# Altium PCB PCB1.PcbDoc
Units mil, origin at the board's own origin, x right, y up, seen from the top; angles counter-clockwise.
Board outline 12099 x 3110 mil, 2 copper layers (Top Layer, Bottom Layer); 46 components, 45 nets, 164 pads, 7 vias.
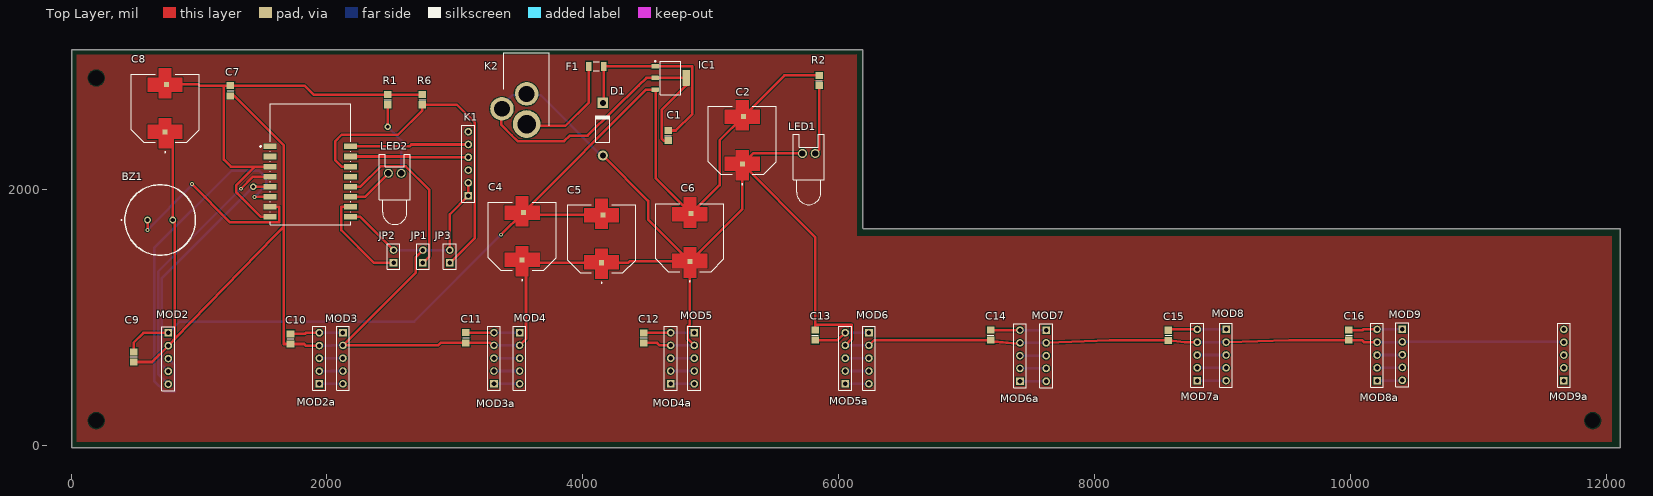
[diagram p0: Top Layer view]
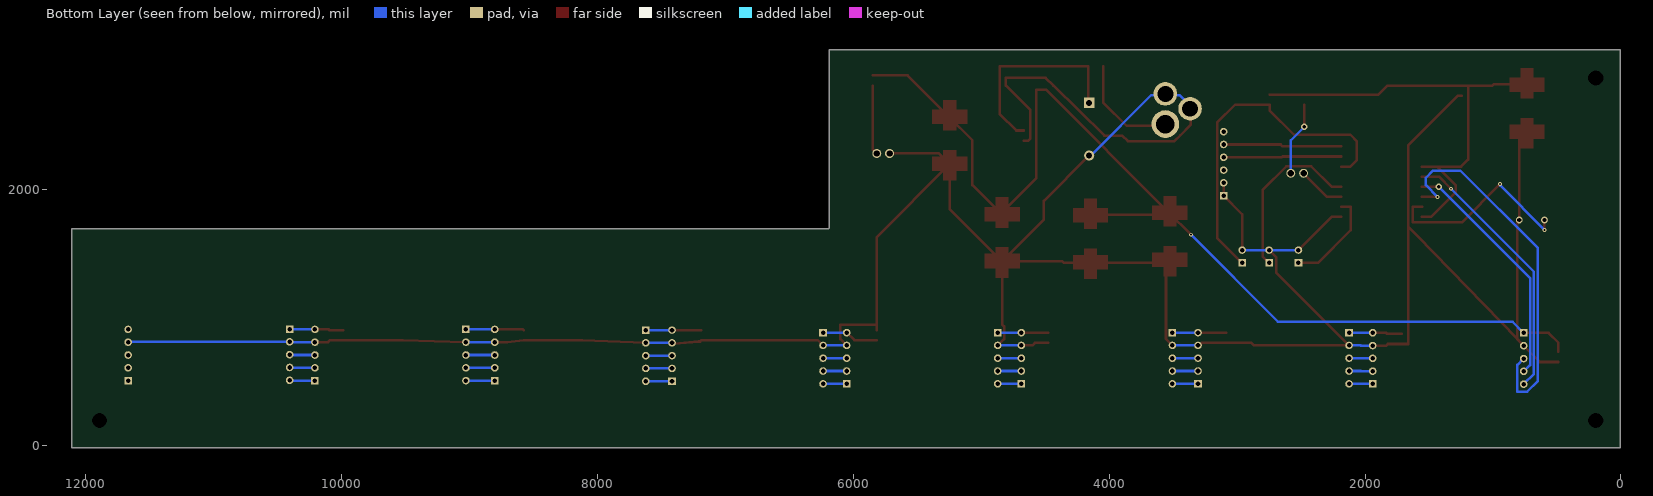
[diagram p1: Bottom Layer view, seen from below]

## Layer stack, top to bottom
Top Solder: solder mask 0.4, Solder Resist, Dk 3.5
Top Layer: signal copper 1.4
Dielectric 1: dielectric 12.6, FR-4, Dk 4.8
Bottom Layer: signal copper 1.4
Bottom Solder: solder mask 0.4, Solder Resist, Dk 3.5

## Board outline
5.96,-15.51 5.96,3092.49 7.96,3094.49 314.94,3094.49 314.96,3094.49 6184.96,3094.49 6184.96,1704.49 6194.96,1694.49 12104.96,1694.49 12104.96,-15.51

## Design rules (kind name [scope] priority, off if disabled: settings)
Clearance [All] p1: gap=7 ignorepadtopadclearanceinfootprint=FALSE
HoleSize [All] p1: absolutevalues=TRUE maxlimit=200 minlimit=1 maxpercent=80.000 minpercent=20.000
PolygonConnect [All] p1: connectstyle=Relief reliefconductorwidth=10 reliefentries=4 polygonreliefangle="90 Angle" airgapwidth=10
RoutingVias [All] p1: holewidth=28 width=50 viastyle="Through Hole" minholewidth=28 minwidth=50 maxholewidth=28 maxwidth=50
SolderMaskExpansion [All] p1: expansion=4 istentingtop=FALSE
Width [All] p1: maxlimit=20 minlimit=20 preferedwidth=20 minimp=50.000000 maximp=50.000000 favimp=50.000000
29 further rules are at their usual default settings.

## Classes and differential pairs
component class Voeding: C1 C2 D1 F1 IC1 K2 LED1 R2
component class Project: BZ1 C4 C5 C6 C7 C8 C9 C10 C11 C12 C13 C14 C15 C16 JP1 JP2 JP3 K1 LED2 MOD2 MOD2a MOD3 MOD3a MOD4 MOD4a MOD5 MOD5a MOD6 MOD6a MOD7 MOD7a MOD8 MOD8a MOD9 MOD9a R1 R6

## Components (designator, comment, footprint, x,y, rotation, side; value= is the part's Value field where it differs from the comment)
BZ1 "PS1420P02CT" PS1440P02BT 696.53,1764.49 r0 top
C1 "Cap" 6-0805_M 4664.96,2424.49 r90 top value=100nF
C2 "Cap" CAP_EEV-FK1K101V 5245.12,2387.48 r90 top value=10uF
C4 "Cap" CAP_EEV-FK1K101V 3525.12,1637.48 r90 top value=100uF
C5 "Cap" CAP_EEV-FK1K101V 4145.12,1617.48 r90 top value=100uF
C6 "Cap" CAP_EEV-FK1K101V 4835.12,1627.48 r90 top value=100uF
C7 "Cap" 6-0805_M 1244.96,2774.49 r90 top value=100nF
C8 "" CAP_EEV-FK1K101V 735.12,2637.48 r90 top value=100uF
C9 "Cap" 6-0805_M 489.96,694.49 r90 top value=100nF
C10 "Cap" 6-0805_M 1714.96,835.12 r90 top value=100nF
C11 "Cap" 6-0805_M 3084.96,844.49 r90 top value=100nF
C12 "Cap" 6-0805_M 4474.96,843.86 r90 top value=100nF
C13 "Cap" 6-0805_M 5814.96,864.49 r90 top value=100nF
C14 "Cap" 6-0805_M 7184.96,865.12 r90 top value=100nF
C15 "Cap" 6-0805_M 8574.96,863.86 r90 top value=100nF
C16 "Cap" 6-0805_M 9984.96,864.49 r90 top value=100nF
D1 "Diode 1N4004" DO-41 4154.96,2474.49 r90 top
F1 "Fuse 1" CAPC3216X94N 4104.96,2964.49 r0 top
IC1 "LM3940IMP-3.3" DCY0004A_L 4684.96,2874.49 r0 top
JP1 "Header 2" HDR1X2 2749.96,1429.49 r90 top
JP2 "Header 2" HDR1X2 2519.96,1429.49 r90 top
JP3 "Header 2" HDR1X2 2959.96,1429.49 r90 top
K1 "Header 6" HDR1X6 3104.96,1954.49 r90 top
K2 "MJ-180PH" MJ-180PH 3560,2501.97 r90 top
LED1 "LED0" LED-0 5764.96,2284.49 r0 top
LED2 "LED0" LED-0 2529.96,2129.49 r0 top
MOD2 "Header 5" HDR1X5#1 759.96,881.99 r270 top
MOD2a "Header 5" HDR1X5#1 1939.96,483.49 r90 top
MOD3 "Header 5" HDR1X5#1 2124.96,884.49 r270 top
MOD3a "Header 5" HDR1X5#1 3304.96,484.49 r90 top
MOD4 "Header 5" HDR1X5#1 3504.96,884.49 r270 top
MOD4a "Header 5" HDR1X5#1 4684.96,484.49 r90 top
MOD5 "Header 5" HDR1X5#1 4869.96,884.49 r270 top
MOD5a "Header 5" HDR1X5#1 6049.96,484.49 r90 top
MOD6 "Header 5" HDR1X5#1 6234.96,884.49 r270 top
MOD6a "Header 5" HDR1X5#1 7414.96,504.49 r90 top
MOD7 "Header 5" HDR1X5#2 7619.96,904.49 r270 top
MOD7a "Header 5" HDR1X5#1 8799.96,509.49 r90 top
MOD8 "Header 5" HDR1X5#1 9024.96,909.49 r270 top
MOD8a "Header 5" HDR1X5#1 10204.96,509.49 r90 top
MOD9 "Header 5" HDR1X5#1 10403,912 r270 top
MOD9a "Header 5" HDR1X5#1 11664.96,509.49 r90 top
R1 "Res1" 6-0805_M 2474.96,2704.49 r90 top value=220
R2 "Res1" 6-0805_M 5844.96,2854.49 r90 top value=330
R6 "Res1" 6-0805_M 2744.96,2704.49 r90 top value=10K
? "ESP-12S" Adafruit_Industries_ESP-12S_MFG 1869.92,2201.65 r0 top

## Footprints (in the part's own frame and the unit in brackets; to place one, negate y for a bottom-side part, rotate by r counter-clockwise, add the part's x,y. Pads: shape width x height; smd on the part's side, far side on the other; paste and mask are expansions set on the pad)
6-0805_M [mm] "Chip Resistor, Body 2.0x1.2mm, IPC Low Density"
  rect 1.4x1.5 smd: 1(-1,0) 2(1,0)
  silkscreen extent 0,-0.65 0,0.65, body extent -1.07,-0.7 1.07,0.7, height 0.7
Adafruit_Industries_ESP-12S_MFG [mm]
  rect 2.6x1.1 smd paste+0 mask+0: 1(-8,3.5) 2(-8,1.5) 3(-8,-0.5) 4(-8,-2.5) 5(-8,-4.5) 6(-8,-6.5) 7(-8,-8.5) 8(-8,-10.5) 9(8,-10.5) 10(8,-8.5) 11(8,-6.5) 12(8,-4.5) 13(8,-2.5) 14(8,-0.5) 15(8,1.5) 16(8,3.5)
  silkscreen extent -10,-12 8,12, body extent -8,-12 8,12, height 3.2
CAP_EEV-FK1K101V [mm]
  rect 1x1 smd paste-1 mask+0: 1(-4.75,0) 2(4.75,-0.25)
  Top Layer region: -3.25,1.25 -1.95,1.25 -1.95,-1.25 -3.25,-1.25 -3.25,-3.45 -6.05,-3.45 -6.05,-1.25 -7.95,-1.25 -7.95,1.25 -6.05,1.25 -6.05,3.45 -3.25,3.45
  Top Layer region: 6.05,1.25 7.95,1.25 7.95,-1.25 6.05,-1.25 6.05,-3.45 3.25,-3.45 3.25,-1.25 1.95,-1.25 1.95,1.25 3.25,1.25 3.25,3.45 6.05,3.45
  silkscreen extent -8.8,-6.75 6.75,6.75
CAPC3216X94N [mil]
  rect 44x71 smd: 1(-59,0) 2(59,0)
  silkscreen extent -24,-35 24,35
DCY0004A_L [mm] "SOT223, 4-Leads, Body 6.7x3.7mm, Pitch 2.3mm, IPC High Density"
  rrect11% 1.45x0.9 smd: 1(-3.075,2.3) 2(-3.075,0) 3(-3.075,-2.3)
  rrect7% 1.45x3.15 smd: 4(3.075,0)
  silkscreen extent -3.2,-3.35 2.05,3.42, body extent -3.5,-3.25 3.5,3.25, height 1.62
DO-41 [mm] "Diode, Axial; Body 5.2 x 2.7 mm (LxDia. max), Lead Dia. 0.86 mm (max)"
  round 2 hole 1.2: 1(-5.23,0)
  rect 2x2 hole 1.2: 2(5.23,0)
  silkscreen extent -2.65,-1.4 2.75,1.4
HDR1X2 [mm] "Connector; Header; 2 Position"
  rect 1.5x1.5 hole 0.9: 1(0,0)
  round 1.5 hole 0.9: 2(2.54,0)
  silkscreen extent -1.27,-1.27 3.81,1.27
HDR1X5#1 [mm] "Connector; Header; 5 Position"
  rect 1.5x1.5 hole 0.9: 1(0,0)
  round 1.5 hole 0.9: 2(2.54,0) 3(5.08,0) 4(7.62,0) 5(10.16,0)
  silkscreen extent -1.27,-1.27 11.43,1.27
HDR1X5#2 [mm] "Connector; Header; 5 Position"
  rect 1.5x1.5 hole 0.9: 1(0,0)
  round 1.5 hole 0.9: 2(2.54,0) 4(7.62,0) 5(10.16,0) ""(5.08,0)
  silkscreen extent -1.27,-1.27 11.43,1.27
HDR1X6 [mm] "Connector; Header; 6 Position"
  rect 1.5x1.5 hole 0.9: 1(0,0)
  round 1.5 hole 0.9: 2(2.54,0) 3(5.08,0) 4(7.62,0) 5(10.16,0) 6(12.7,0)
  silkscreen extent -1.27,-1.27 13.97,1.27
LED-0 [mil] "LED; 2 Leads"
  round 70 hole 50: 1(50,0) 2(-50,0)
  silkscreen extent -120,-400 120,150
MJ-180PH [mm]
  round 5.5 hole 3.65: 1(0.3,0)
  round 4.67 hole 3.16: 2(6.3,0) 3(3.35,4.9)
  silkscreen extent 0,-4.5 14.5,4.5
PS1440P02BT [mm]
  round 1.35 hole 0.85: 1(-2.5,0) 2(2.5,0)
  silkscreen extent -7.77,-7 7,7

## Part data
BZ1: "Loudspeaker or Buzzer", Manufacturer_Name=TDK, Mouser Part Number=810-PS1420P02CT, Arrow Part Number=PS1420P02CT, Arrow Price/Stock=https://www.arrow.com/en/products/ps1420p02ct/tdk, Datasheet Link=https://product.tdk.com/info/en/catalog/datasheets/piezoelectronic_buzzer_ps_en.pdf, Manufacturer_Part_Number=PS1420P02CT, Mouser Price/Stock=https://www.mouser.co.uk/ProductDetail/TDK/PS1420P02CT/?qs=%2FYUS%2FYztVmCoyuykscZK%252Bw%3D%3D
C1 C2 C4 C5 C6 C7 C9 C10 C11 C12 C13 C14 C15 C16: "Capacitor", LatestRevisionDate=17-Jul-2002, LatestRevisionNote="Re-released for DXP Platform.", PackageDescription="Radial Cap, Thru-Hole; 2 Leads; 0.3 in Pin Spacing", PackageReference=RAD-0.3, Published=8-Jun-2000, Publisher="Altium Limited"
C8: library part Cap, "Capacitor", LatestRevisionDate=17-Jul-2002, LatestRevisionNote="Re-released for DXP Platform.", PackageDescription="Radial Cap, Thru-Hole; 2 Leads; 0.3 in Pin Spacing", PackageReference=RAD-0.3, Published=8-Jun-2000, Publisher="Altium Limited"
D1: "1 Amp General Purpose Rectifier", Code_JEDEC=DO-204-AL, ComponentLink1Description="Manufacturer Link", ComponentLink1URL=http://www.fairchildsemi.com/, ComponentLink2Description=Datasheet, ComponentLink2URL=http://www.fairchildsemi.com/ds/1N%2F1N4001.pdf, DatasheetVersion=1998, LatestRevisionDate=17-Jul-2002, LatestRevisionNote="Re-released for DXP Platform.", PackageDescription="Diode, Axial; Body 5.2 x 2.7 mm (LxDia. max), Lead Dia. 0.86 mm (max)", PackageReference=DO-41, PackageVersion=Aug-1999, Published=8-Jun-2000, Publisher="Altium Limited"
F1: "Fuse", LatestRevisionDate=17-Jul-2002, LatestRevisionNote="Re-released for DXP Platform.", PackageDescription="Thru-Hole; 2 Leads", PackageReference=PIN-W2/E2.8, Published=8-Jun-2000, Publisher="Altium Limited"
IC1: library part CMP-0062-01793-3, "1A Low Dropout Regulator for 5V to 3.3V Conversion, 4-pin SOT-223", Manufacturer="Texas Instruments", PackageTopMarking=XYTT*L52B, PowerWise=N, Code_IPC=SOT223-4, Code_JEDEC=TO-261-AA, ComponentLink1Description="Datasheet URL", ComponentLink1URL=http://www.ti.com/general/docs/lit/getliterature.tsp?genericPartNumber=LM3940&fileType=pdf, CompType="LDO IC", PackageDescription="Molded SOT-223, 6.50 x 3.56 x 1.6mm Body, 4 Lead, 2.3mm Pitch", PackageReference=DCY0004A, PinCount=4, RoHS=N
JP1 JP2 JP3: "Header, 2-Pin", LatestRevisionDate=17-Jul-2002, LatestRevisionNote="Re-released for DXP Platform.", Publisher="Altium Limited"
K1: "Header, 6-Pin", LatestRevisionDate=17-Jul-2002, LatestRevisionNote="Re-released for DXP Platform.", Publisher="Altium Limited"
K2: "Connector", Manufacturer_Name=MULTICOMP, Datasheet Link=http://www.farnell.com/datasheets/1910033.pdf, Manufacturer_Part_Number=MJ-180PH
LED1 LED2: "Typical INFRARED GaAs LED", LatestRevisionDate=08-Jul-2005, LatestRevisionNote="Mech Layer 1 removed.", PackageDescription="LED; 2 Leads", PackageReference=LED-0, Published=8-Jun-2000, Publisher="Altium Limited"
MOD2 MOD2a MOD3 MOD3a MOD4 MOD4a MOD5 MOD5a MOD6 MOD6a MOD7 MOD7a MOD8 MOD8a MOD9 MOD9a: "Header, 5-Pin", LatestRevisionDate=17-Jul-2002, LatestRevisionNote="Re-released for DXP Platform.", Publisher="Altium Limited"
R1 R2 R6: "Resistor", LatestRevisionDate=17-Jul-2002, LatestRevisionNote="Re-released for DXP Platform.", PackageDescription="Axial Device, Thru-Hole; 2 Leads; 0.3 in Pin Spacing", PackageReference=AXIAL-0.3, Published=8-Jun-2000, Publisher="Altium Limited"

## Free pads (board coordinates)
  round 60 hole 118.11: 1(196.85,196.85) 1(196.85,2874.02) 1(11889.76,196.85)

## Via types
v1: diameter 30, hole 15, Top Layer to Bottom Layer, 5 vias
v2: diameter 50, hole 28, Top Layer to Bottom Layer, 2 vias

## Nets (pads, with @x,y where several pads share a name; then routed paths per layer and width w, separated by ;. In a path a pad name is that pad's centre, name@x,y a point inside that pad or via, vN(x,y) a via of type N, cw(c..) or ccw(c..) an arc to the next point about the centre after c; other vN are vias at no path point)
+5: C2.2 C4.2 C5.2 C6.2 C9.2 IC1.3 MOD2.1 R2.2 | length 8334.6
  Top Layer w20: C9.2 489.96,806.99 564.96,881.99 MOD2.1 ; v1(3360.12,1649.65) C4.2 ; C5.2 3554.96,1804.49 C4.2 ; R2.2 5574.33,2893.86 C2.2 5067.96,2387.49 5067.96,2037.49 C6.2 4567.96,2091.49 4567.96,2783.94 IC1.3 4494.41,2783.94 C4.2
  Bottom Layer w20: MOD2.1 847.46,969.49 2679.96,969.49 v1(3360.12,1649.65)
GND: ?.9 BZ1.2 C1.1 C2.1 C4.1 C5.1 C6.1 C7.1 C8.1 C9.1 C10.1 C11.1 C12.1 C13.2 C14.1 C15.1 C16.1 D1.1 IC1.2 IC1.4 JP1.2 JP2.2 JP3.2 K1.1 K1.2 K2.2 K2.3 LED1.2 MOD2.2 MOD2a.4 MOD3.2 MOD3a.4 MOD4.2 MOD4a.4 MOD5.2 MOD5a.4 MOD6.2 MOD6a.4 MOD7.2 MOD7a.4 MOD8.2 MOD8a.4 MOD9.2 MOD9a.4 | length 26567.7
  Top Layer w20: C9.1 633.09,655.12 MOD2.2 ; C8.1 794.96,2390.63 BZ1.2 809.96,1749.49 809.96,833.67 ; C7.1 1275.61,2735.12 1661.18,2349.55 1661.18,1711.23 ; MOD2a.4 1833.22,783.49 1820.96,795.75 C10.1 1661.18,795.75 1661.18,1711.23 ; ?.9 2261.18,1788.27 JP2.2 ; JP1.2 2694.96,1474.49 2694.96,1354.49 MOD3.2 2867.96,784.49 2888.59,805.12 C11.1 3273.76,805.12 3294.39,784.49 MOD3a.4 ; JP3.2 2959.96,1809.49 K1.1 K1.2 ; K2.3@3362.05,2648.35 3362.05,2507.4 3443.57,2425.88 3489.45,2380 3853.51,2380 3898,2424.49 4036.68,2424.49 4434.41,2813.94 4494.96,2874.49 IC1.2 IC1.4 4806.02,2815.49 4614.96,2624.42 4614.96,2401.12 4630.96,2385.12 C1.1 ; MOD4.2 3554.96,834.49 3554.96,1430.47 ; C4.1 3554.96,1430.47 ; D1.1 4508.98,1914.57 4508.98,1766.61 C6.1 ; C12.1 4579.96,804.49 4599.96,784.49 MOD4a.4 ; MOD5.2 4819.96,834.49 4819.96,932.49 4835.12,947.65 C6.1 ; LED1.2 5329.13,2284.49 C2.1 ; C13.2 5814.96,946.49 ; MOD5a.4 6099.96,834.49 6099.96,944.49 6097.96,946.49 5814.96,946.49 ; MOD6.2 6276.22,825.75 C14.1 7195.8,814.91 7204.66,814.91 7400.63,799.23 7408.79,799.23 7414.4,804.01 MOD6a.4 ; MOD7.2 8117.96,824.49 C15.1 8701.96,809.49 MOD7a.4 ; MOD8.2 9520.59,825.12 C16.1 10086.96,825.12 10102.59,809.49 MOD8a.4 ; MOD2.2 809.96,831.99 809.96,833.67 ; MOD2.2 809.96,833.67 ; 809.96,833.67 1594.96,1645.01 1661.18,1711.23 ; 3554.96,1430.47 C5.1 4354.45,1430.47 4364.45,1440.47 C6.1 ; C6.1 5245.12,1850.47 C2.1 ; C2.1 5814.96,1630.63 5814.96,946.49
  Bottom Layer w20: MOD2a.4 2031.96,783.49 2032.96,784.49 MOD3.2 ; JP2.2 JP1.2 JP3.2 ; MOD3a.4 MOD4.2 ; K2.3 3367.09,2657.09 3449.79,2739.79 3549.79,2739.79 K2.2 3570.21,2739.79 3670.21,2739.79 4141.42,2268.58 D1.1 ; MOD4a.4 MOD5.2 ; MOD5a.4 MOD6.2 ; MOD6a.4 MOD7.2 ; MOD7a.4 MOD8.2 ; MOD8a.4 MOD9.2@10403,809.49 ; MOD9.2 11662.45,812 MOD9a.4
Net_4: ?.4 MOD2.5 | length 2093.3
  Top Layer w20: v1(1329.18,2008.75) 1423.66,2103.23 ?.4
  Bottom Layer w20: MOD2.5 680.43,561.52 680.43,1360 v1(1329.18,2008.75)
Net_5: ?.5 MOD2.4 | length 1889
  Top Layer w20: v2(1424.96,2024.49) ?.5
  Bottom Layer w20: MOD2.4 710.43,631.52 710.43,1309.96 v2(1424.96,2024.49)
Net_6: ?.6 MOD2.3 | length 2970.1
  Top Layer w20: v1@1434.34,1945.75 ?.6
  Bottom Layer w20: MOD2.3 809.96,631.99 809.96,422.49 732.96,422.49 649.96,505.49 649.96,1544.49 1255.96,2150.49 1468.96,2150.49 1524.96,2094.49 1524.96,2036.37 v1@1434.02,1945.43
  other v1: 1434.96,1944.49
Net_7: ?.7 BZ1.1 | length 1582
  Top Layer w20: v1@594.96,1684.49 v1(596.53,1686.06) 598.11,1687.64 BZ1.1 ; v1(944.96,2044.49) 1242.96,1746.49 1626.96,1746.49 1626.96,1867.01 ?.7
  Bottom Layer w20: v1(596.53,1686.06) 943.05,2032.57 943.05,2042.57 v1(944.96,2044.49)
Net_10: ?.10 JP2.1 | length 767.1
  Top Layer w20: ?.10 2112.96,1867.01 2112.96,1684.49 2367.96,1429.49 JP2.1
Net_11: ?.11 LED2.2 | length 371.2
  Top Layer w20: ?.11 2296.22,1945.75 LED2.2
Net_12: ?.12 JP1.1 | length 1348.7
  Top Layer w20: ?.12 2260.96,2024.49 2420.96,2184.49 2614.96,2184.49 2799.96,1999.49 2799.96,1479.49 JP1.1
Net_14: ?.14 JP3.1 R6.1 | length 2757.8
  Top Layer w20: ?.14 2114.96,2181.97 2063.96,2232.97 2063.96,2379.49 2114.96,2430.49 2553.96,2430.49 2744.96,2621.49 R6.1 3014.96,2665.12 3154.96,2525.12 3154.96,1624.49 JP3.1
Net_15: ?.15 K1.4 | length 922.7
  Top Layer w20: ?.15 2644.96,2260.71 2651.18,2254.49 K1.4
Net_16: ?.16 K1.5 | length 926.3
  Top Layer w20: ?.16 2644.96,2339.45 2660,2354.49 K1.5
NetC1_2: C1.2 D1.2 F1.2 IC1.1 | length 1591.3
  Top Layer w20: D1.2 4163.96,2709.76 F1.2 4362.96,2964.49 4363.51,2965.04 IC1.1 4854.96,2965.04 4854.96,2594.49 4724.33,2463.86 C1.2
NetC10_2: C10.2 MOD2a.5 MOD3.1 | length 414.1
  Top Layer w20: C10.2 1826.96,874.49 1835.96,883.49 MOD2a.5
  Bottom Layer w20: MOD2a.5 2031.96,883.49 2032.96,884.49 MOD3.1
NetC11_2: C11.2 MOD3a.5 MOD4.1 | length 420.3
  Top Layer w20: C11.2 3193.96,883.86 3194.59,884.49 MOD3a.5
  Bottom Layer w20: MOD3a.5 MOD4.1
NetC12_2: C12.2 MOD4a.5 MOD5.1 | length 395.5
  Top Layer w20: C12.2 4476.22,884.49 MOD4a.5
  Bottom Layer w20: MOD4a.5 MOD5.1
NetC13_1: C13.1 MOD5a.5 MOD6.1 | length 444.6
  Top Layer w20: C13.1 5990.59,825.12 MOD5a.5
  Bottom Layer w20: MOD5a.5 MOD6.1
NetC14_2: C14.2 MOD6a.5 MOD7.1 | length 435
  Top Layer w20: C14.2 MOD6a.5
  Bottom Layer w20: MOD6a.5 MOD7.1
NetC15_2: C15.2 MOD7a.5 MOD8.1 | length 452.6
  Top Layer w20: C15.2 8581.22,909.49 MOD7a.5
  Bottom Layer w20: MOD7a.5 MOD8.1
NetC16_2: C16.2 MOD8a.5 MOD9.1 | length 420.4
  Top Layer w20: C16.2 10091.96,903.86 10097.59,909.49 MOD8a.5
  Bottom Layer w20: MOD8a.5 MOD9.1@10403,909.49
NetF1_1: F1.1 K2.1 | length 848.2
  Top Layer w20: K2.1 3573.78,2500 3861.69,2500 4045.96,2684.27 F1.1
NetLED1_1: LED1.1 R2.1 | length 543.1
  Top Layer w20: LED1.1 5844.96,2314.49 R2.1
NetLED2_1: LED2.1 R1.1 | length 579.1
  Top Layer w20: v2(2474.96,2492.49) R1.1
  Bottom Layer w20: v2(2474.96,2492.49) 2579.96,2387.49 LED2.1
NetMOD2a_1: MOD2a.1 MOD3.5 | length 185.4
  Bottom Layer w20: MOD2a.1 2031.96,483.49 2032.96,484.49 MOD3.5
NetMOD2a_2: MOD2a.2 MOD3.4 | length 185.4
  Bottom Layer w20: MOD2a.2 2031.96,583.49 2032.96,584.49 MOD3.4
NetMOD2a_3: MOD2a.3 MOD3.3 | length 185.4
  Bottom Layer w20: MOD2a.3 2031.96,683.49 2032.96,684.49 MOD3.3
NetMOD3a_1: MOD3a.1 MOD4.5 | length 200
  Bottom Layer w20: MOD3a.1 MOD4.5
NetMOD3a_2: MOD3a.2 MOD4.4 | length 200
  Bottom Layer w20: MOD3a.2 MOD4.4
NetMOD3a_3: MOD3a.3 MOD4.3 | length 200
  Bottom Layer w20: MOD3a.3 MOD4.3
NetMOD4a_1: MOD4a.1 MOD5.5 | length 185
  Bottom Layer w20: MOD4a.1 MOD5.5
NetMOD4a_2: MOD4a.2 MOD5.4 | length 185
  Bottom Layer w20: MOD4a.2 MOD5.4
NetMOD4a_3: MOD4a.3 MOD5.3 | length 185
  Bottom Layer w20: MOD4a.3 MOD5.3
NetMOD5a_1: MOD5a.1 MOD6.5 | length 185
  Bottom Layer w20: MOD5a.1 MOD6.5
NetMOD5a_2: MOD5a.2 MOD6.4 | length 185
  Bottom Layer w20: MOD5a.2 MOD6.4
NetMOD5a_3: MOD5a.3 MOD6.3 | length 185
  Bottom Layer w20: MOD5a.3 MOD6.3
NetMOD6a_1: MOD6a.1 MOD7.5 | length 205
  Bottom Layer w20: MOD6a.1 MOD7.5
NetMOD6a_2: MOD6a.2 MOD7.4 | length 205
  Bottom Layer w20: MOD6a.2 MOD7.4
NetMOD6a_3: MOD6a.3 MOD7. | length 205
  Bottom Layer w20: MOD6a.3 MOD7.
NetMOD7a_1: MOD7a.1 MOD8.5 | length 225
  Bottom Layer w20: MOD7a.1 MOD8.5
NetMOD7a_2: MOD7a.2 MOD8.4 | length 225
  Bottom Layer w20: MOD7a.2 MOD8.4
NetMOD7a_3: MOD7a.3 MOD8.3 | length 225
  Bottom Layer w20: MOD7a.3 MOD8.3
NetMOD8a_1: MOD8a.1 MOD9.5 | length 198
  Bottom Layer w20: MOD8a.1 MOD9.5@10403,509.49
NetMOD8a_2: MOD8a.2 MOD9.4 | length 198
  Bottom Layer w20: MOD8a.2 MOD9.4@10403,609.49
NetMOD8a_3: MOD8a.3 MOD9.3 | length 198
  Bottom Layer w20: MOD8a.3 MOD9.3@10403,709.49
VCC: ?.3 ?.8 C7.2 C8.2 R1.2 R6.2 | length 3599.7
  Top Layer w20: C8.2 994.96,2824.49 1005.59,2813.86 1194.96,2813.86 ; ?.8 1484.16,1788.27 1289.92,1982.51 1289.92,2035.65 1436.24,2181.97 ; ?.3 1436.24,2181.97 ; R6.2 2744.33,2744.49 2477.56,2744.49 2476.93,2743.86 R1.2 1894.96,2743.86 1824.96,2813.86 C7.2 1194.96,2813.86 ; 1194.96,2813.86 1194.96,2235.97 1248.96,2181.97 1436.24,2181.97
pads on no net: ?.1 ?.2 ?.13 K1.3 K1.6 MOD9a.1 MOD9a.2 MOD9a.3 MOD9a.5

## Polygon pours and split planes (outlines as drawn)
no net on Top Layer "NONET_L01_P001" (solid, pour order 1): 45,3055 45,31 12039,31 12039,1640 12038,1639 6140,1639 6140,3060

## Silkscreen, mask and mechanical layers (free items; w line width, h text height)
BoardOutline:
  lines w10: 30,20 30,3070 6150,3070 6150,1650 12050,1650 12050,20 30,20